# Altium PCB POTS.PcbDoc
Units mil, origin at the board's own origin, x right, y up, seen from the top; angles counter-clockwise.
Board outline 1125 x 750 mil, 2 copper layers (Top Layer, Bottom Layer); 4 components, 6 nets, 24 pads, 0 vias.
Unrouted connection lines stored in the file: 1.
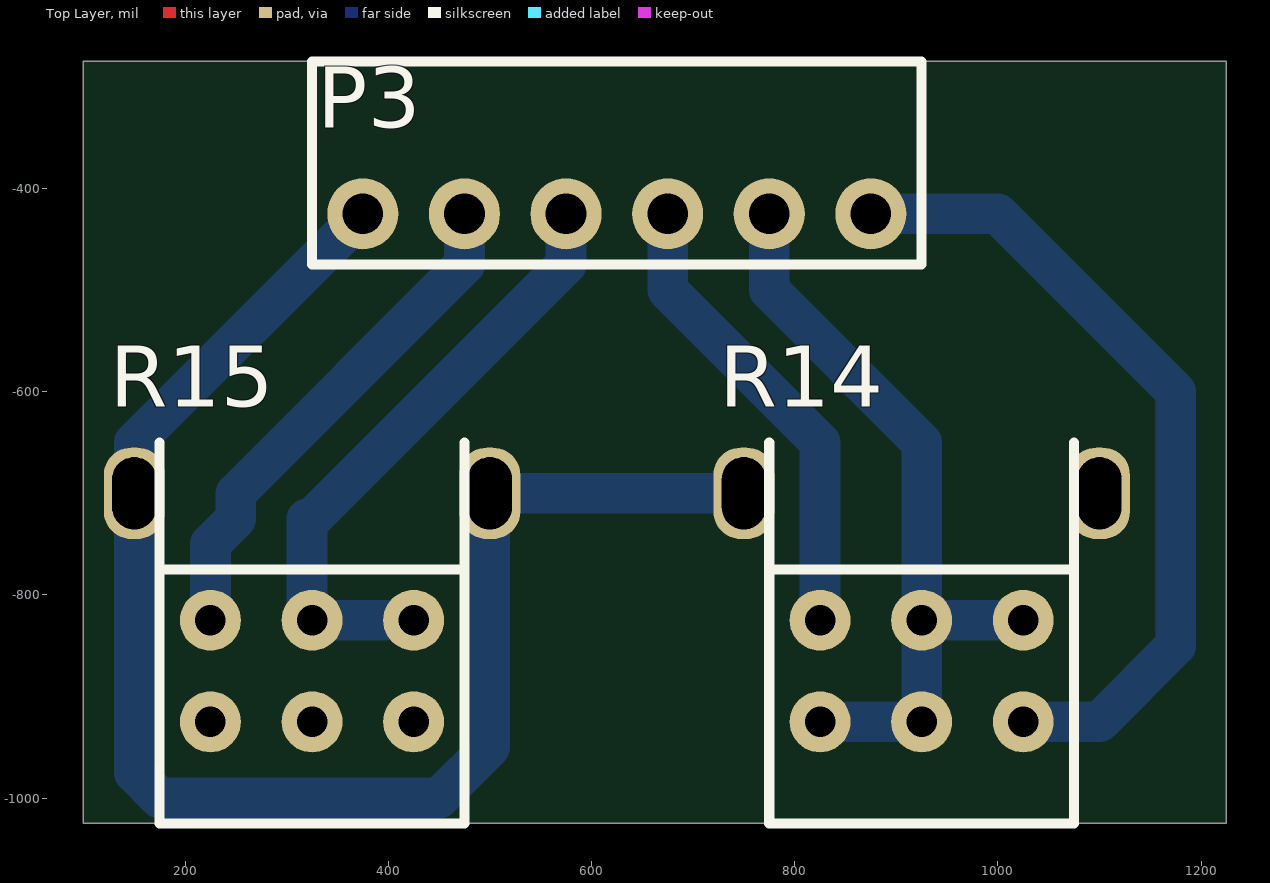
[diagram p0: Top Layer view]
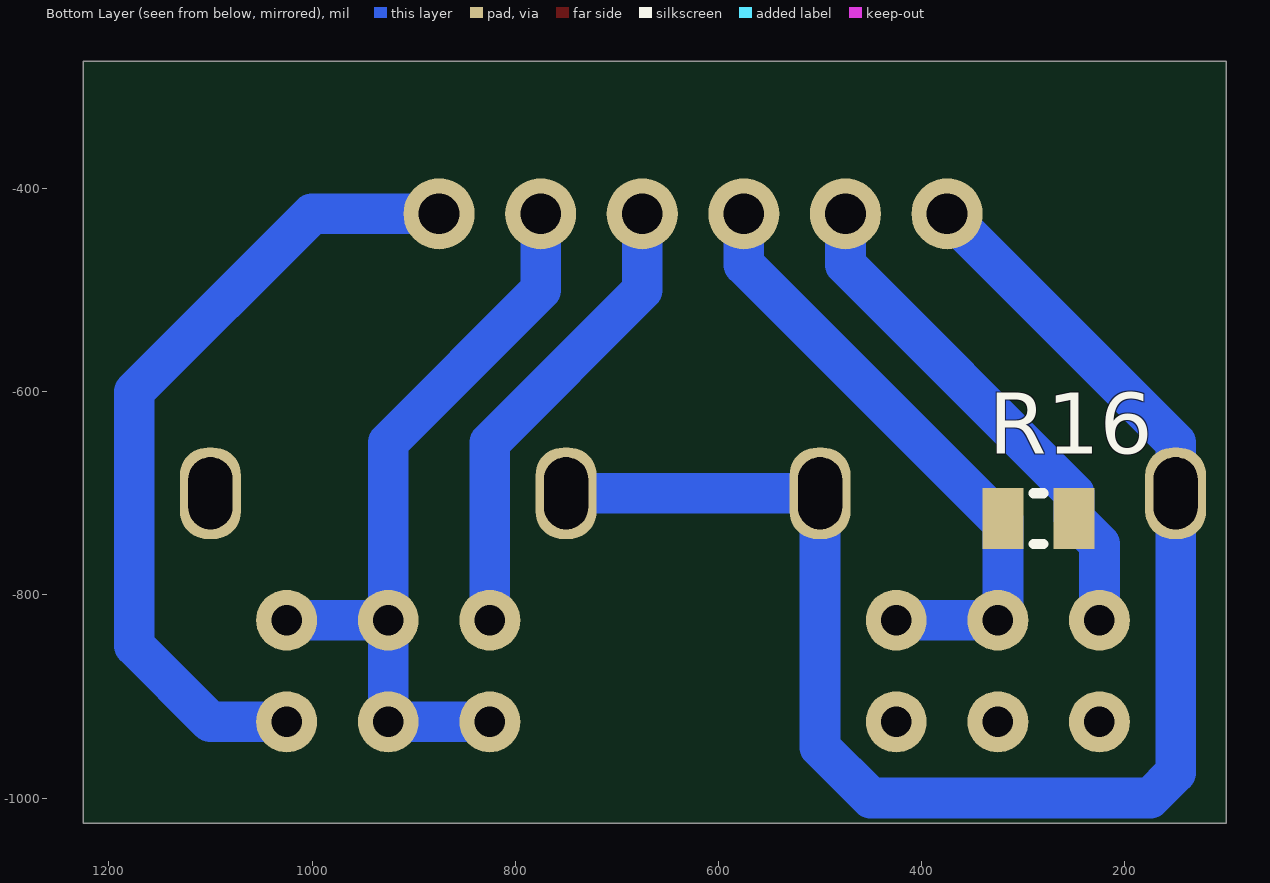
[diagram p1: Bottom Layer view, seen from below]

## Layer stack, top to bottom
Top Solder: solder mask 0.4, Solder Resist, Dk 3.5
Top Layer: signal copper 1.4
Dielectric 1: dielectric 12.6, FR-4, Dk 4.8
Bottom Layer: signal copper 1.4
Bottom Solder: solder mask 0.4, Solder Resist, Dk 3.5

## Board outline
100,-1025 100,-275 1225,-275 1225,-1025

## Design rules (kind name [scope] priority, off if disabled: settings)
Clearance [All] p1: gap=10
PolygonConnect [All] p1: connectstyle=Relief reliefconductorwidth=10 reliefentries=4 polygonreliefangle="90 Angle" airgapwidth=10
RoomDefinition POTS [InComponentClass('POTS')] p1 off: confinementstyle=ConfineIn formatcopy=TRUE lockcomponents=FALSE outline 100,-1025 1225,-1025 1225,-275 100,-275
RoutingVias [All] p1: holewidth=28 width=50 viastyle="Through Hole" minholewidth=28 minwidth=50 maxholewidth=28 maxwidth=50
SilkToBoardRegionClearance [All] p1 off:
SolderMaskExpansion [All] p1: expansion=4
Width [All] p1: maxlimit=40 minlimit=40 preferedwidth=40
28 further rules are at their usual default settings.

## Classes and differential pairs
component class POTS: P3 R14 R16

## Components (designator, comment, footprint, x,y, rotation, side; value= is the part's Value field where it differs from the comment)
P3 "SIL-CONN-6" SIL-CONN-6-R1 875,-425 r270 top
R14 "RK09L12B0A31" RK09L12B0A31 825,-925 r90 top
R15 "RK09L12B0A31" RK09L12B0A31 225,-925 r90 top
R16 "Resistor" 0805_Resistor 325,-725 r90 bottom

## Footprints (in the part's own frame and the unit in brackets; to place one, negate y for a bottom-side part, rotate by r counter-clockwise, add the part's x,y. Pads: shape width x height; smd on the part's side, far side on the other; paste and mask are expansions set on the pad)
0805_Resistor [mil]
  rect 60x40 smd: 1(0,-5) 2(0,-75)
  silkscreen extent -25,-45 25,-35, body extent -25,-79 25,-1, height 31
RK09L12B0A31 [mil]
  round 60 hole 30: 1(0,0) 2(0,-100) 3(0,-200) 4(100,0) 5(100,-100) 6(100,-200)
  rrect90% 90x60 hole 43.31 slot 70.87 at 0 deg: 7(225,75) 8(225,-275)
  silkscreen extent -100,-250 275,50, body extent -100,-250 150,50, height 433
SIL-CONN-6-R1 [mil]
  round 70 hole 40: 1(0,0) 2(0,-100) 3(0,-200) 4(0,-300) 5(0,-400) 6(0,-500)
  silkscreen extent -150,-550 50,50, body extent -386,-550 13,50, height 99

## Nets (pads, with @x,y where several pads share a name; then routed paths per layer and width w, separated by ;. In a path a pad name is that pad's centre, name@x,y a point inside that pad or via, vN(x,y) a via of type N, cw(c..) or ccw(c..) an arc to the next point about the centre after c; other vN are vias at no path point)
GND: P3.6 R14.7 R14.8 R15.7 R15.8 | length 1524.3
  Bottom Layer w40: P3.6 150,-650 R15.7 150,-975 175,-1000 450,-1000 500,-950 R15.8 R14.7
NetP3_1: P3.1 R14.3 | length 803.6
  Bottom Layer w40: P3.1 1000,-425 1175,-600 1175,-850 1100,-925 R14.3
NetP3_2: P3.2 R14.1 R14.2 R14.5 R14.6 | length 762.1
  Bottom Layer w40: P3.2 775,-500 925,-650 R14.5 ; R14.1 R14.2 R14.5 ; R14.6 R14.5
NetP3_3: P3.3 R14.4 | length 462.1
  Bottom Layer w40: P3.3 675,-500 825,-650 R14.4
NetP3_4: P3.4 R15.5 R15.6 R16.1 | length 603.6
  Bottom Layer w40: R15.5@320,-820 R16.1 325,-725 575,-475 P3.4 ; R15.5 R15.6
NetP3_5: P3.5 R15.4 R16.2 | length 503.6
  Bottom Layer w40: R15.4 225,-750 R16.2 250,-700 475,-475 P3.5
pads on no net: R15.1 R15.2 R15.3

## Silkscreen, mask and mechanical layers (free items; w line width, h text height)
Mechanical 1:
  the board outline again, w10